# Altium PCB PCB_Nowy.PcbDoc (part 2 of 2)
Units mil, origin at the board's own origin, x right, y up, seen from the top; angles counter-clockwise.
Board outline 6000 x 4000 mil, 6 copper layers (Top Layer, Layer 1, Zasilanie, GND, Layer 2, Bottom Layer), stack 32.112 mil thick; 107 components, 109 nets, 435 pads, 101 vias.
Unrouted connection lines stored in the file: 59.
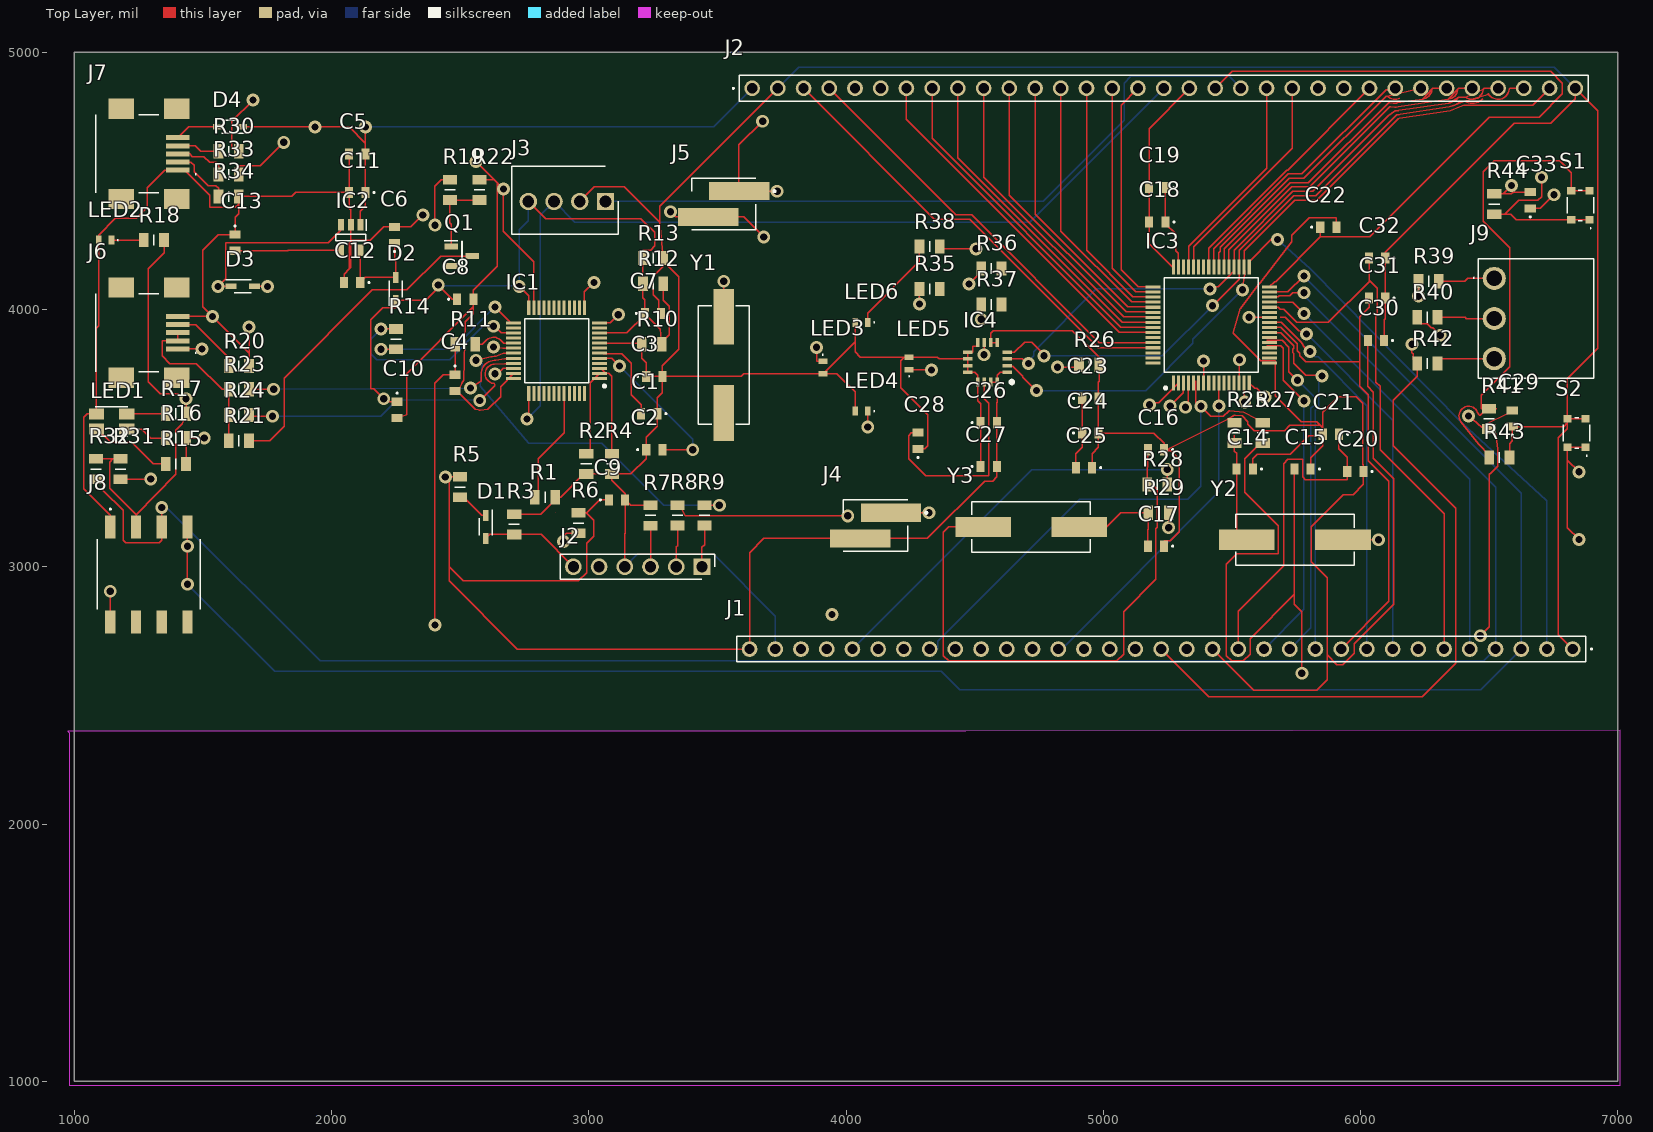
[diagram p0: Top Layer view]

## Via types
v1: diameter 50, hole 28, Top Layer to Bottom Layer, 101 vias

## Nets (pads, with @x,y where several pads share a name; then routed paths per layer and width w, separated by ;. In a path a pad name is that pad's centre, name@x,y a point inside that pad or via, vN(x,y) a via of type N, cw(c..) or ccw(c..) an arc to the next point about the centre after c; other vN are vias at no path point) (continued)
STM_RST: (continued)
  Bottom Layer w5: J2.4@3140,3000 3188,3048 3485,3048 3725,2808 J1.32 ; J2.2@3735,4860 3817,4942 6753,4942 J2.33
SWIM: IC1.22 IC1.45
SWIM_IN: IC1.21 IC1.43 IC1.46
SWIM_RST: IC1.42
SWIM_RST_IN: IC1.41
T_JTCK: IC1.15 IC1.26
T_JTDI: IC1.17
T_JTDO: IC1.16
T_JTMS: IC1.27 R14.2 | length 799.3
  Top Layer w5: v1(2192.44,3924.37) R14.2 ; v1(2630,3935) 2634.36,3935 2660.47,3908.9 IC1.27
  Bottom Layer w5: v1(2192.44,3924.37) 2152.44,3884.37 2152.44,3829.06 2175.87,3805.63 2458.91,3805.63 2588.28,3935 v1(2630,3935)
T_SWDIO_IN: IC1.25 R14.1 | length 666.9
  Top Layer w5: v1(2192.44,3845.63) R14.1 ; v1(2635,4010) 2696.73,3948.27 IC1.25
  Bottom Layer w5: v1(2192.44,3845.63) 2470.63,3845.63 v1(2635,4010)
T_SWO: IC1.31 R9.2 | length 1455.9
  Top Layer w5: v1(2561.86,3802.44) 2619.87,3815.78 cw(c2635,3750) 2631.7,3817.42 ccw(c2629.76,3854.87) 2644.85,3820.54 2666.73,3830.16 IC1.31 ; R9.2 v1(3507.56,3239.37)
  Bottom Layer w5: v1(2561.86,3802.44) 2572.56,3802.44 2585,3790 2578.22,3704.21 2578.21,3704.01 2578.21,3701.97 2766.85,3480.97 2768.45,3479.37 3050.99,3479.37 3290.99,3239.37 v1(3507.56,3239.37)
U5V: D3.2 J6.1 R19.1 | length 1553.9
  Top Layer w5: J6.1 v1(1497,3847.01) ; D3.2 v1(1751.24,4090) ; v1(2402,4328) 2402,4480 2426.37,4504.37 R19.1
  Layer 1 w5: v1(1497,3847.01) 1497,3990 1520,4013 1674.24,4013 v1(1751.24,4090) 1989.24,4328 v1(2402,4328)
USB_DM: IC1.32 R23.1 | length 1095.2
  Top Layer w5: R23.1 v1(1775,3690) ; v1(2540.09,3694.8) 2581.02,3721.18 2582.86,3723.02 2582.86,3727.16 2582.51,3749.16 cw(c2635,3750) 2632.28,3802.43 ccw(c2629.76,3854.87) 2638.65,3803.13 2673.94,3809.19 2681.61,3809.19 IC1.32
  Bottom Layer w5: v1(1775,3690) v1(2540.09,3694.8)
USB_DP: IC1.33 R24.1 | length 1205.5
  Top Layer w5: R24.1 1684.37,3585 v1(1770,3585) ; v1(2576.1,3646.67) 2601.15,3671.15 2634.19,3704.19 2635.43,3705.43 2635.43,3709.57 2632.5,3712.5 2630.02,3712.83 cw(c2635,3750) 2633.27,3787.46 2673.94,3789.51 2681.61,3789.51 IC1.33
  Bottom Layer w5: v1(1770,3585) 2191.57,3585 2255.1,3648.54 2259.25,3648.54 v1(2576.1,3646.67)
VDD: J2.5@4035,4860 J4.1 R44.2 S1.1 S1.3 | length 5507.2
  Top Layer w5: J4.1 v1(4323,3210) ; R44.2 6561.63,4370.63 ; v1(6704,4514) 6704,4439 6690,4425 6616,4425 6561.63,4370.63 ; S1.1 S1.3 6605.1,4348.9 6583.37,4370.63 6561.63,4370.63
  Layer 1 w5: J2.5@4035,4860 4142,4967 6360,4967 6385,4942 6385,4833 v1(6704,4514)
  Layer 2 w5: J2.5@4035,4860 4035,3498 v1(4323,3210)
VDD3: C18.2 C19.2 C20.2 C21.1 C22.1 C23.1 C24.1 C25.2 IC3.1 IC3.13 IC3.19 IC3.32 IC3.48 IC3.64 J1.14 J1.31 J2.18 J2.19 | length 7341.2
  Top Layer w5: C25.2 4893.5,3440 4918.5,3465 C24.1 4918.5,3537 C23.1 ; IC3.48@5270.73,4164.27 5178.5,4256.5 C18.2 C19.2 5178.5,4703.5 J2.18 ; J2.19 5501,4926 6739,4926 6785,4880 6785,4838 6695,4748 6501,4748 6036,4283 5843.5,4283 ; J1.14 5525,2828 5701.26,3004.26 5701.26,3400 5718.26,3417 5775,3417 5775,3350 5786,3339 5948.5,3339 C20.2 5948.5,3426 5916.5,3458.01 C21.1 ; IC3.32 5665.91,4107.64 5671.04,4107.64 5843.5,4283 ; C22.1 5843.5,4283
  Layer 1 w5: J1.31 4100,2405 5250,2405 J1.14 ; J2.18 J2.19
pads on no net: IC1.4 IC1.11 IC1.14 IC1.19 IC1.28 IC1.38 IC1.39 IC1.40 J6.MP1 J6.MP2 J6.MP3 J6.MP4 J7.MP1 J7.MP2 J7.MP3 J7.MP4 J8.4 J8.8 Q1.2 Y1.1

## Polygon pours and split planes (outlines as drawn)
no net on Bottom Layer "NONET_L06_P000" (solid, pour order 0): 990,2330 980,2340 985,2345 985,5010 6990,5010 7005,4995 7005,2330
no net on Top Solder "NONET_L06_P-001" (solid): 995,5005 995,2370 1000,2365 1005,2370 6995,2370 6995,5000
no net on GND (split plane): 6979.9,2385.04 4464.96,2380.1 1020.1,2380.1 1020.1,4979.9 6979.9,4979.9
no net on Zasilanie (split plane): 6979.9,2385.04 4464.96,2380.1 1020.1,2380.1 1020.1,4979.9 6979.9,4979.9